# Altium PCB RX_PCB.PcbDoc
Units mil, origin at the board's own origin, x right, y up, seen from the top; angles counter-clockwise.
Board outline 640 x 1508 mil, 2 copper layers (Top Layer, Bottom Layer); 42 components, 35 nets, 158 pads, 44 vias.
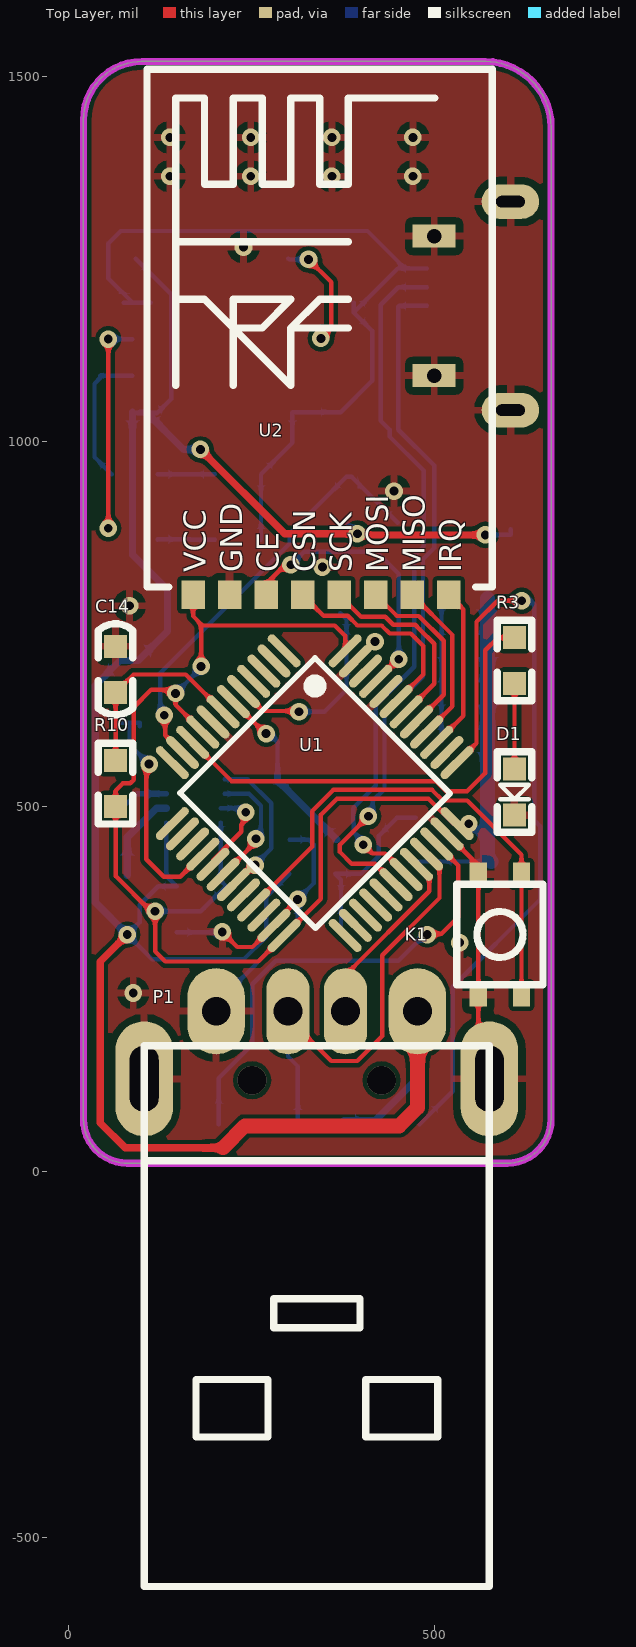
[diagram p0: Top Layer view]
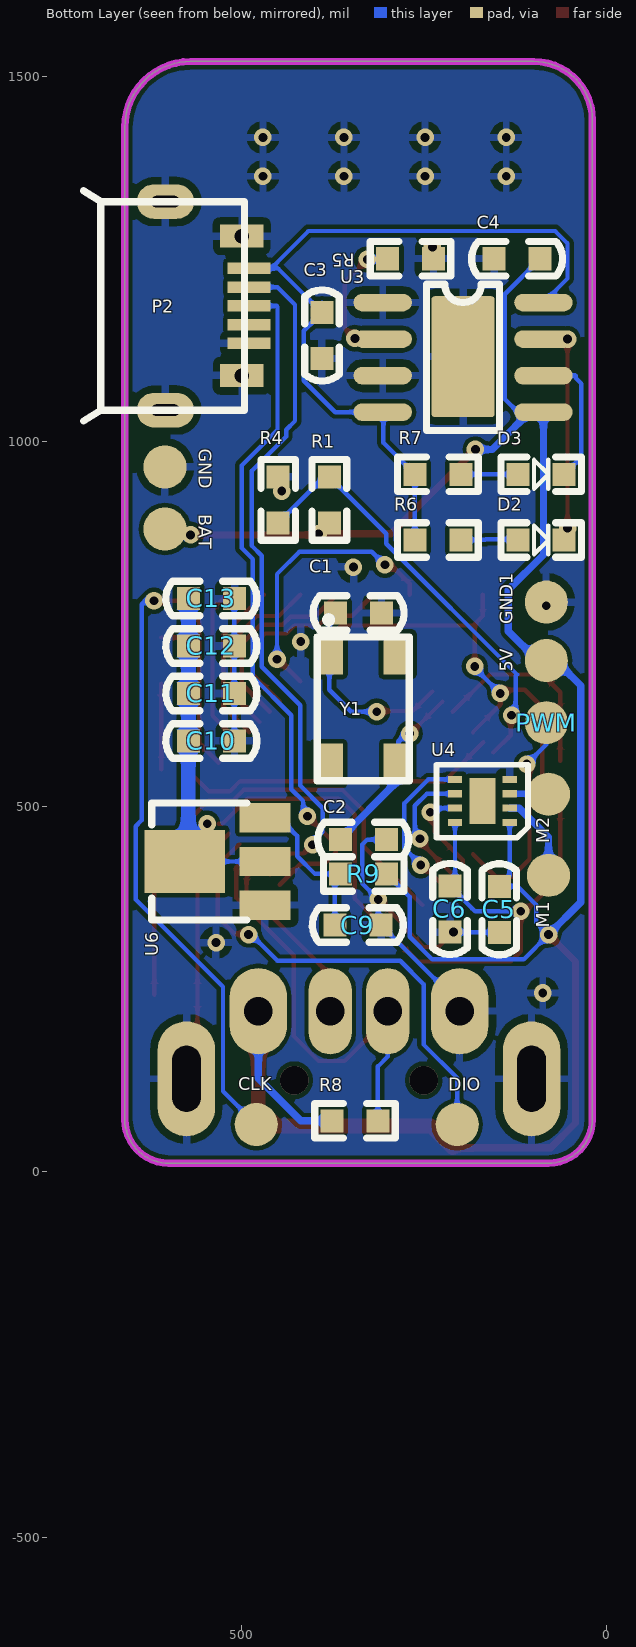
[diagram p1: Bottom Layer view, seen from below]
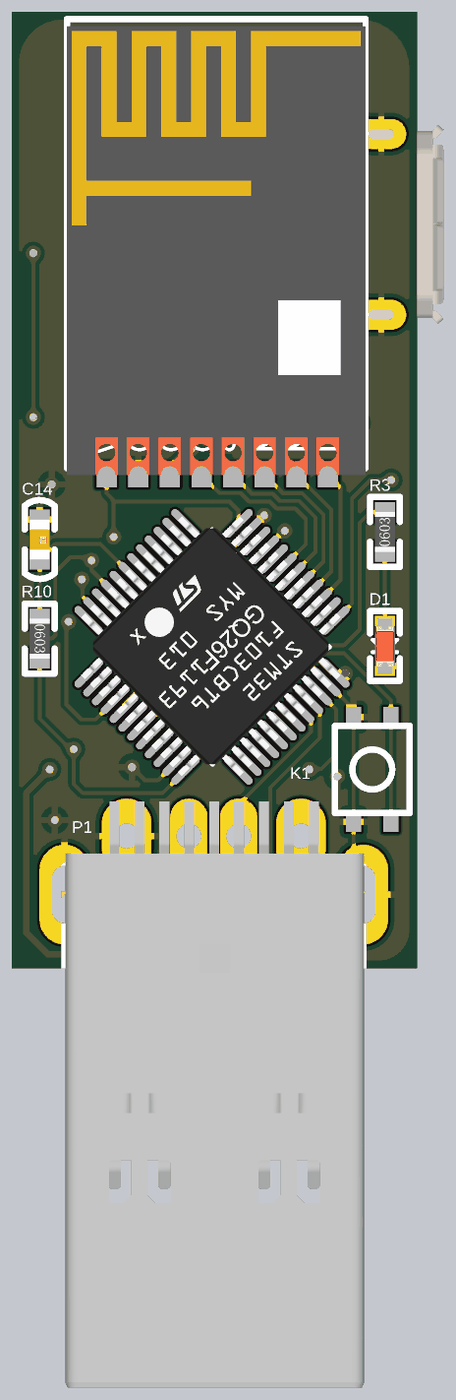
[diagram p2: 3D render of the assembled board from above, using the file's embedded part models]
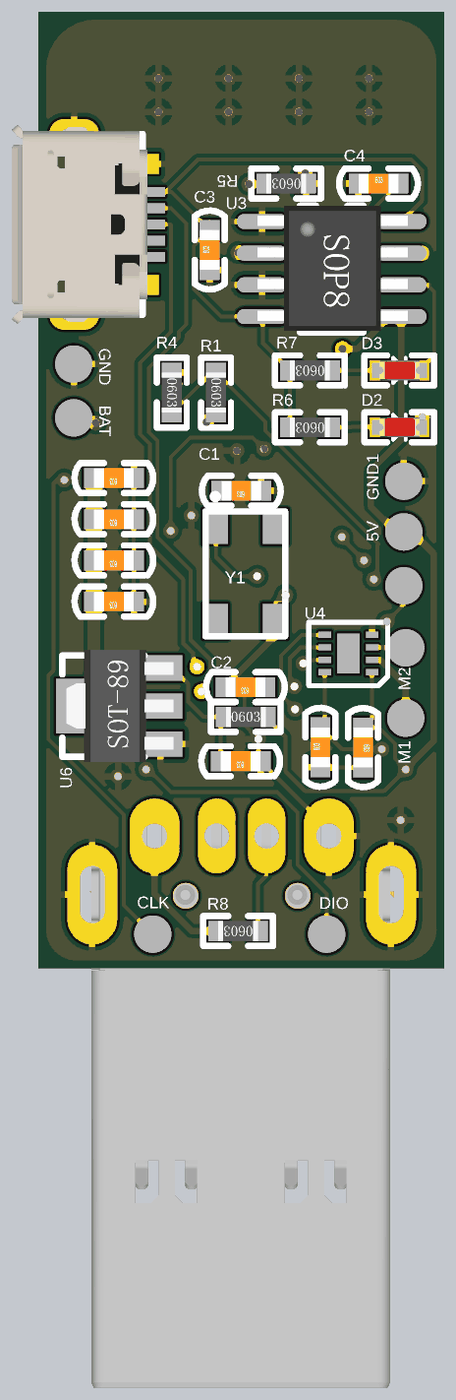
[diagram p3: 3D render of the assembled board from below, using the file's embedded part models]

## Layer stack, top to bottom
Top Solder: solder mask 0.4, Solder Resist, Dk 3.5
Top Layer: signal copper 1.4
Dielectric 1: dielectric 12.6, FR-4, Dk 4.8
Bottom Layer: signal copper 1.4
Bottom Solder: solder mask 0.4, Solder Resist, Dk 3.5

## Board outline
20,72 ccw(c80,72) 80,12 600,12 ccw(c600,72) 660,72 660,1430 ccw(c570,1430) 570,1520 100,1520 ccw(c100,1440) 20,1440

## Design rules (kind name [scope] priority, off if disabled: settings)
Clearance [All] p1: gap=6 ignorepadtopadclearanceinfootprint=FALSE except(0: Arc-Hole Track-Hole SMDPad-Hole THPad-Hole Via-Hole Fill-Hole Poly-Hole Region-Hole Text-Hole)
ComponentClearance [All] p1 off: gap=1 collisioncheckmode=3 verticalgap=1 showdistances=FALSE
Height [All] p1 off: minheight=0 maxheight=1000 prefheight=500
HoleSize [IsVia] p1: absolutevalues=TRUE maxlimit=100 minlimit=5 maxpercent=80.000 minpercent=20.000
HoleToHoleClearance [All] p1: gap=1 allowstackedmicrovias=TRUE
MinimumSolderMaskSliver [All] p1: minsoldermaskwidth=1
PolygonConnect [All] p1: connectstyle=Relief reliefconductorwidth=10 reliefentries=4 polygonreliefangle="90 Angle" airgapwidth=10
RoutingVias [All] p1: holewidth=12 width=24 viastyle="Through Hole" minholewidth=5 minwidth=5 maxholewidth=28 maxwidth=50
SMDNeckDown [All] p1: percent=80.000
SilkToSilkClearance [All] p1: silktosilkclearance=1
SilkToSolderMaskClearance [IsPad] p1: minsilkscreentomaskgap=0 clearancetoexposedcopper=TRUE
SolderMaskExpansion [All] p1: expansion=4
UnpouredPolygon [All] p1 off:
Width [All] p1: maxlimit=100 minlimit=6 preferedwidth=6
22 further rules are at their usual default settings.

## Components (designator, comment, footprint, x,y, rotation, side; value= is the part's Value field where it differs from the comment)
5V "5V" PAD_B 83,700 r0 bottom
BAT "BAT" PAD_B 605,880 r90 bottom
C1 "22pf" 电容_C0603 340,765 r0 bottom
C2 "22pf" 电容_C0603 333.5,455 r0 bottom
C3 "4.7uF" 电容_C0603 390,1145 r90 bottom
C4 "4.7uF" 电容_C0603 123,1250 r180 bottom
C5 "4.7uF" 电容_C0603 147.4,359.53 r270 bottom
C6 "4.7uF" 电容_C0603 215,360 r90 bottom
C9 "22uF" 电容_C0603 341,338 r0 bottom
C10 "1uF" 电容_C0603 541.5,590 r0 bottom
C11 "1uF" 电容_C0603 541.5,655 r0 bottom
C12 "1uF" 电容_C0603 541.5,720 r0 bottom
C13 "22uF" 电容_C0603 541.5,785 r0 bottom
C14 "4.7uF" 电容_C0603 64,688 r270 top
CLK "CLK" PAD_B 480,65 r0 bottom
D1 "red" LED_0603 610,520 r270 top
D2 "red" LED_0603 90,865.16 r180 bottom
D3 "green" LED_0603 90,955 r180 bottom
DIO "DIO" PAD_B 205,65 r0 bottom
GND "GND" PAD_B 605,965 r90 bottom
GND1 "GND" PAD_B 83,780 r0 bottom (schematic designator GND)
K1 "key" 开关按键_SKTH 590,325 r90 top
M1 "M1-OUT1" PAD_B 80,406 r90 bottom
M2 "M1-OUT2" PAD_B 80,517 r90 bottom
P1 "USB MHDR" "接插件_USB 公头 90°" 477.17,220 r90 top
P2 "MICRO USB" "接插件_MICRO 牛角插座 USB 卷边" 496.06,1185.47 r90 bottom
PWM "PWM" Pad_B 83,615 r270 bottom
R1 "10K" 电阻_R0603 380,920 r270 bottom
R3 "100R" 电阻_R0603 610,700 r90 top
R4 "10K" 电阻_R0603 450,920 r270 bottom
R5 "2k" 电阻_R0603 269,1250 r0 bottom
R6 "2k" 电阻_R0603 231.5,865.16 r0 bottom
R7 "2k" 电阻_R0603 231.5,955 r0 bottom
R8 "1.5k" 电阻_R0603 345,70 r0 bottom
R9 "1R" 电阻_R0603 333,408 r180 bottom
R10 "10K" 电阻_R0603 64,531.5 r270 top
U1 "STM32F103C8T6" STM32F103C8T6 340,515 r225 top
U2 "U?" NRF-1 107.01,800.83 r0 top
U3 "TP4056" SOP-8_PAD 197,1116 r180 bottom
U4 "DRV883x" WSON-8 133.2,537.37 r0 bottom
U6 "AMS1117" 稳压芯片_SOT-89 468,365 r90 bottom
Y1 "XTAL" 晶振_5032 381,708.61 r270 bottom

## Footprints (in the part's own frame and the unit in brackets; to place one, negate y for a bottom-side part, rotate by r counter-clockwise, add the part's x,y. Pads: shape width x height; smd on the part's side, far side on the other; paste and mask are expansions set on the pad)
LED_0603 [mm]
  rect 0.8x0.8 smd paste-0.1: A(-0.8,0) K(0.8,0)
  silkscreen extent -1.4,-0.6 1.4,0.6, body extent -0.8,-0.4 0.82,0.4, height 0.6
NRF-1 [mm]
  rect 0.813x1 smd: 1(1.6,-0.275) 2(2.87,-0.275) 3(4.14,-0.275) 4(5.41,-0.275) 5(6.68,-0.275) 6(7.95,-0.275) 7(9.22,-0.275) 8(10.49,-0.275)
  silkscreen extent 0,0 12,18, body extent -0.01,-0.28 11.99,17.72, height 2.27
PAD_B [mm]
  round 1.5 smd: 1(0,0)
Pad_B [mm]
  round 1.5 smd: 1(0,0)
SOP-8_PAD [mil]
  oval 80x24 smd: 1(-110,74) 2(-110,24) 3(-110,-26) 4(-110,-76) 5(110,-76) 6(110,-26) 7(110,24) 8(110,74)
  rrect10% 86.61x165.35 smd: 3(0,0)
  silkscreen extent -50,-101 50,99, body extent -118,-99 120,99, height 63
STM32F103C8T6 [mm]
  oval 0.3x1.5 smd: 1(-2.75,-4.377) 2(-2.25,-4.377) 3(-1.75,-4.377) 4(-1.25,-4.377) 5(-0.75,-4.377) 6(-0.25,-4.377) 7(0.25,-4.377) 8(0.75,-4.377) 9(1.25,-4.377) 10(1.75,-4.377) 11(2.25,-4.377) 12(2.75,-4.377) 25(2.75,4.123) 26(2.25,4.123) 27(1.75,4.123) 28(1.25,4.123) 29(0.75,4.123) 30(0.25,4.123) 31(-0.25,4.123) 32(-0.75,4.123) 33(-1.25,4.123) 34(-1.75,4.123) 35(-2.25,4.123) 36(-2.75,4.123)
  oval 1.5x0.3 smd: 13(4.25,-2.877) 14(4.25,-2.377) 15(4.25,-1.877) 16(4.25,-1.377) 17(4.25,-0.877) 18(4.25,-0.377) 19(4.25,0.123) 20(4.25,0.623) 21(4.25,1.123) 22(4.25,1.623) 23(4.25,2.123) 24(4.25,2.623) 37(-4.25,2.623) 38(-4.25,2.123) 39(-4.25,1.623) 40(-4.25,1.123) 41(-4.25,0.623) 42(-4.25,0.123) 43(-4.25,-0.377) 44(-4.25,-0.877) 45(-4.25,-1.377) 46(-4.25,-1.877) 47(-4.25,-2.377) 48(-4.25,-2.877)
  silkscreen extent -3.33,-3.44 3.3,3.21, body extent -4.5,-4.69 4.52,4.33, height 1.5
WSON-8 [mm]
  rect 0.5x0.25 smd: 1(0,1.5) 2(0,1) 3(0,0.5) 4(0,0) 5(1.9,0) 6(1.9,0.5) 7(1.9,1) 8(1.9,1.5)
  rect 0.9x1.6 smd mask+0.102: 9(0.95,0.75)
  silkscreen extent -0.64,-0.51 2.54,2.03
开关按键_SKTH [mm]
  rect 0.8x0.6 smd: 1(-2.1,-0.75) 1(2.1,-0.75) 2(-2.1,0.75) 2(2.1,0.75)
  silkscreen extent -1.75,-1.5 1.75,1.5
"接插件_MICRO 牛角插座 USB 卷边" [mm]
  oval 1.2x2 hole 0.4 slot 1 at 90 deg: 0(-3.625,2.75) 0(3.625,2.75)
  rect 0.8x1.5 hole 0.5: 0(-2.425,0.1) 0(2.425,0.1)
  rect 0.4x1.5 smd: 1(1.3,-0.15) 2(0.65,-0.15) 3(0,-0.15) 4(-0.65,-0.15) 5(-1.3,-0.15)
  silkscreen extent -4,0 4,5.6, body extent -3.99,-0.18 3.99,5.25, height 2.73
"接插件_USB 公头 90°" [mm]
  oval 4x2 hole 1 slot 2.3 at 0 deg paste+0.762: 0(-2.35,9.5) 0(-2.35,-2.5)
  oval 3x2 hole 1 paste+0.762: 1(0,0) 4(0,7)
  oval 3x1.5 hole 1 paste+0.762: 2(0,2.5) 3(0,4.5)
  silkscreen extent -20,-2.5 -1.2,9.5, body extent -22.11,-2.54 1.39,9.46, height 2.27
晶振_5032 [mm]
  rect 1.4x1 smd: 0(0,2.4) 0(3.8,0) 1(0,0) 2(3.8,2.4)
  silkscreen extent -1.3,-0.4 4.4,2.8
电容_C0603 [mm]
  rect 0.8x0.8 smd: 1(-0.8,0) 2(0.8,0)
  silkscreen extent -1.58,-0.6 1.58,0.6, body extent -0.8,-0.4 0.8,0.4, height 0.3
电阻_R0603 [mm]
  rect 0.8x0.8 smd: 1(-0.8,0) 2(0.8,0)
  silkscreen extent -1.4,-0.6 1.4,0.6, body extent -0.8,-0.4 0.8,0.4, height 0.45
稳压芯片_SOT-89 [mil]
  rect 40x70 smd: 1(0,0) 2(60,0) 3(120,0)
  rect 86.61x110.24 smd: 2(60,110)
  silkscreen extent -20,25 140,155, body extent -28,-21 149,148, height 59

## Part data
5V BAT CLK DIO GND GND1 M1 M2 PWM: library part Pad, _Comma=,, _Funcyusa=Test, _Name=Pad
  5V: _Remarks=5V, _Specification=Pad,Test,5V
  BAT: _Remarks=BAT, _Specification=Pad,Test,BAT
  CLK: _Remarks=CLK, _Specification=Pad,Test,CLK
  DIO: _Remarks=DIO, _Specification=Pad,Test,DIO
  GND GND1: _Remarks=GND, _Specification=Pad,Test,GND
  M1: _Remarks=M1-OUT1, _Specification=Pad,Test,M1-OUT1
  M2: _Remarks=M1-OUT2, _Specification=Pad,Test,M1-OUT2
  PWM: _Remarks=PWM, _Specification=Pad,Test,PWM
C1 C2 C3 C4 C5 C6 C9 C10 C11 C12 C13 C14: library part cap, U=50V, 参数=Cap,0805,X7R,104K,50V,125C,±10%
  C1 C2: C=22pf
  C3 C4 C5 C6 C14: C=4.7uF
  C9 C13: C=22uF
  C10 C11 C12: C=1uF
D1 D2 D3: library part LED, 参数=LED,0603,Red
K1: library part SW-PB_1, 参数="Key,TS-018A 2*4全包无柱带支架 力度250N", 备注=ADD
P2: library part "MICRO USB 5PIN", _Value=5PIN, _Comma=,, _Model="MICRO USB", _Name=Port, _Specification="Port,MICRO USB,5PIN"
R1 R3 R4 R5 R6 R7 R8 R9 R10: library part Res, P=1/8W, 参数=Res,0805,0R,±1%,1/8W,100ppm,155C
  R1 R4 R10: R=10K
  R3: R=100R
  R5 R6: R=2k
  R7: R=10k
  R8: R=1.5k
  R9: R=1R
U1: BOM_LCSC Assembly=Yes, BOM_Manufacturer=STMicroelectronics, BOM_Manufacturer Part=STM32F103C8T6, BOM_Supplier=LCSC, BOM_Supplier Part=C8734, image=//image.lceda.cn/szlcsc/C8734.jpg, SMT Type=Basic, spicePre=U, spiceSymbolName=STM32F103C8T6, timeStamp=1455028086
U2: library part NRF, "NRF24L01"
U3: 参数="Charge Control,LP4056,ESOP-8"
Y1: F=8m

## Via types
v1: diameter 24, hole 12, Top Layer to Bottom Layer, tented both sides, 39 vias
v2: diameter 24, hole 12, Top Layer to Bottom Layer, 3 vias
v3: diameter 39.37, hole 39.37, Top Layer to Bottom Layer, 2 vias

## Nets (pads, with @x,y where several pads share a name; then routed paths per layer and width w, separated by ;. In a path a pad name is that pad's centre, name@x,y a point inside that pad or via, vN(x,y) a via of type N, cw(c..) or ccw(c..) an arc to the next point about the centre after c; other vN are vias at no path point)
3V3: C6.2 C10.2 C11.2 C12.2 C13.2 R10.2 U1.9 U1.24 U1.36 U1.48 U2.1 U4.8 U6.2 | length 2268.1
  Top Layer w6: U2.1 170,761 181,750 ; v1(181,692) 181,750 ; U1.9 146,639.4 v1(146,655) 146,659 145,660 112.5,660 88.75,636.25 88.75,540.55 89,540.3 89,537 84,532 74,532 64,522 R10.2 64,405 112,357 v1(118,357) 118,302 131.94,288.06 259.1,288.06 U1.24 345,373.96 345,489 367,511 492.21,511 526.43,476.78 U1.36 ; U1.48 378.22,733.78 364,748 183,748 181,750
  Bottom Layer w6: v1(118,357) 180.5,357 C6.2 ; v1(146,655) 181,690 v1(181,692) ; 185.5,361 185.5,362 C6.2 ; U4.8 208,398.5 C6.2 ; U6.2@468,425 578,425 578,446 v1(547.22,476.78)
  Bottom Layer w20: C13.2 C12.2 C11.2 C10.2 572.99,430.01 U6.2@578,425
5V: 5V.1 BAT.1 C4.2 C5.1 P1.1 R1.2 R8.2 R9.2 U3.5 U4.1 | length 3300.6
  Top Layer w6: v1(395,873.5) v1@396.5,872
  Top Layer w10: v1(80,325) 43,288 43,67 77,33 211,33 ; v2(180,989) 295.5,873.5 v1(395,873.5) ; v1@396.5,872 v1(570,872)
  Top Layer w20: 211,33 241,63 452,63 477.17,88.17 P1.1
  Bottom Layer w6: U3.5 88,1039 121,1039 140,1058 140,1201.5 C4.2 ; U3.5@96,1040 U3.5@106,1040 ; U4.1 133.2,405.23 C5.1 122.33,391.02 97,365.7 97,342 v1(80,325) 114,291 239,291 270,322 270,376.5 R9.2 ; R1.2 v1(395,873.5) ; v1(570,872) 605,872 BAT.1
  Bottom Layer w10: v1(80,325) 36,369 36,666 70,700 5V.1 95,700 135,740 135,797 87,845 U3.5 ; U3.5@106,1040 157,989 v2(180,989) ; R8.2 419,70 477.17,128.17 P1.1
BAT_DET: R1.1 R4.2 U1.11 | length 593.3
  Top Layer w6: v1(130.53,625.18) 131.86,623.84 131.86,597.86 U1.11
  Bottom Layer w6: v1(130.53,625.18) 125,630.7 125,678.94 123,680.94 302,859.94 302,873.5 R1.1 387.01,951.5 R4.2
GND: C1.1 C2.1 C3.1 C4.1 C5.2 C6.1 C9.1 C10.1 C11.1 C12.1 C13.1 C14.1 D1.K GND1.1 GND.1 K1.2 P1.0 P1.4 P2.0 P2.5 R4.1 R5.1 U1.8 U1.23 U1.35 U1.44 U1.47 U2.2 U3.1 U3.3 U4.4 U6.1 | length 1107
  Top Layer w6: P1.4 P1.4@215.99,220 ; v1(210,328.5) 230.5,308 251.2,308 U1.23 280.79,340.79 v1(313,373) ; U1.35 560.47,419.8 560.47,407.68 560.47,242.32 560.47,142.6 P1.0@575.59,127.48
  Bottom Layer w6: C5.2 214.53,328.03 210,323.5 v1(210,328.5) ; P1.4 201.57,230.07 C9.1 313,341.5 v1(313,373) 335,395 335,448.25 328.25,455 C2.1 ; C10.1 C11.1 C12.1 C13.1
  other v1: 88,245 535,314 419,726 83,775 347,828 445,932 239,1266 138,1363 249,1363 360,1363 471,1363 138,1416 249,1416 360,1416 471,1416
KEY: K1.1 U1.21 | length 688.9
  Top Layer w6: U1.21 333,445.47 333,493.97 362.03,523 497.18,523 511.79,508.39 545.31,508.39 568.22,485.48 619.53,434.17 619.53,407.68 K1.1@619.53,242.32
LED: R3.2 U1.10 | length 654
  Top Layer w6: U1.10 222.56,535 502.15,535 516.15,521 545,521 570,546 570,714 587.5,731.5 R3.2
M1-IN1: U1.18 U4.6 | length 173.6
  Top Layer w6: U1.18 257,452.99 256,453.99 v1(256,456)
  Bottom Layer w6: U4.6@213,517.68 246.49,517.68 263,501.17 263,462.21 256.79,456 v1(256,456)
M1-IN2: U1.19 U4.5 | length 214.1
  Top Layer w6: U1.19 251.85,420 v1(255,420)
  Bottom Layer w6: U4.5@213,537.37 244.63,537.37 277.26,504.74 277.26,443.26 254,420 v1(255,420)
M1-SLP: U1.17 U4.7 | length 140.5
  Top Layer w6: U1.17 197.27,426.97 236,465.7 236,475 242,481 v1(242,492.47) 242.53,492.47 v1@237,498 ; v1@237,498 235,496 236.74,497.74 v1@237,498
  Bottom Layer w6: U4.7 236.47,498 v1(242,492.47) v1@241.76,492.24
MCU_RX: P2.2 U1.31 | length 977.4
  Top Layer w6: v2(403,448) 415,436 432.92,436 U1.31 U1.31@460.75,407.18
  Bottom Layer w6: v2(403,448) v2@407,448 ; P2.2 451,1211.06 427,1187.06 427,1028 439,1016 439,1006.72 486,959.72 486,856.97 472.67,843.64 472.67,837.67 472.67,714 472.67,691.67 420,639 420,529 389,498 389,478.3 389.75,477.55 389.75,465.25 401,454 v2@407,448 ; v2@407,448 411,448 412,447 410,445 v2@407,448
MCU_TX: P2.3 U1.30 | length 958.6
  Top Layer w6: v2(410,487) 371,448 371,438 387,422 419.08,422 U1.30
  Bottom Layer w6: v2(410,487) 416,487 416,508.03 432,524.03 432,625 484.67,677.67 484.67,838.67 500,854 500,967 451,1016 451,1184.47 452,1185.47 P2.3
NetC9_2: C9.2 R9.1 U6.3 | length 231.9
  Bottom Layer w6: C9.2 372.5,400 R9.1 399.7,408 424,432.3 424,460 449,485 U6.3 U6.3@475,485
NetD1_A: D1.A R3.1 | length 117
  Top Layer w6: D1.A R3.1
NetD2_A: D2.A R6.1 | length 79.7
  Bottom Layer w6: D2.A 121.5,866 166.16,866 167,865.16 R6.1
NetD2_K: D2.K U3.7 | length 292
  Top Layer w6: v1(54,881) v1(54,1140)
  Bottom Layer w6: v1(54,1140) U3.7
NetD3_A: D3.A R7.1 | length 78.5
  Bottom Layer w6: D3.A R7.1
NetD3_K: D3.K U3.6 | length 192
  Bottom Layer w6: D3.K 35,978.5 35,1079 43,1087 43,1090 U3.6
NetM1_1: M1.1 U4.2 | length 121.8
  Bottom Layer w10: M1.1 80,458 120,498 U4.2
NetM2_1: M2.1 U4.3 | length 72.6
  Bottom Layer w6: M2.1@70,495 M2.1@92.68,517.68
  Bottom Layer w8: M2.1@92.68,517.68 U4.3
NetR5_2: R5.2 U3.2 | length 154.6
  Top Layer w6: v1(328,1249) 359,1218 359,1155 v1(345,1141)
  Bottom Layer w6: R5.2 301.5,1249 v1(328,1249)
NRF_CE: U1.45 U2.3 | length 388.4
  Top Layer w6: U2.3 270,805 296,831 v1(304,831) ; U1.45 450,701.67 v1(451.67,701.67)
  Bottom Layer w6: v1(304,831) 322,849 421,849 451.67,818.33 v1(451.67,701.67)
NRF_CSN: U1.43 U2.4 | length 285.6
  Top Layer w6: U2.4 348.69,761.31 381.71,761.31 394.97,748.06 428,748.06 439.06,737 440,737 468,737 474,731 485,720 485,680.99 U1.43
NRF_IRQ: U1.39 U2.8 | length 218.2
  Top Layer w6: U1.39@508.5,593.13 540,624.63 540,770 U2.8
NRF_MISO: U1.40 U2.7 | length 225.4
  Top Layer w6: U2.7 525,735 525,637.47 U1.40
NRF_MOSI: U1.41 U2.6 | length 245.6
  Top Layer w6: U2.6 449,761 479,761 513,727 513,653.31 U1.41
NRF_SCK: U1.42 U2.5 | length 266.7
  Top Layer w6: U2.5 399.94,760.06 432.97,760.06 444.03,749 474.03,749 480.03,743 500,723.03 500,668.15 U1.42
NRST: C14.2 R10.1 U1.7 | length 272
  Top Layer w6: R10.1 C14.2 88.5,681 160.08,681 U1.7
OSC_IN: C1.2 U1.5 Y1.1 | length 272
  Top Layer w6: U1.5 265.76,631 v1@314,631
  Bottom Layer w6: v1(315,630) 350,630 380,660 380,695 380,756.5 C1.2
OSC_OUT: C2.2 U1.6 Y1.2 | length 252.4
  Top Layer w6: U1.6 268.92,600 v1(270,600)
  Bottom Layer w6: v1(270,600) 275,600 285.51,589.49 Y1.2@285.51,545.39
  Bottom Layer w10: Y1.2@285.51,545.39 285.51,535.98 366.5,455 C2.2
PWM: PWM.1 U1.16 | length 331.8
  Top Layer w6: v1(109.75,558.34) 106,554.59 106,428 130,404 152.33,404 U1.16
  Bottom Layer w6: PWM.1@70,615 97,615 PWM.1@97,610 ; PWM.1 83,585.08 v1(109.75,558.34)
SWCLK: CLK.1 U1.37 | length 1080.5
  Top Layer w6: U1.37 558,586.96 558,753 587,782 v1(620,782)
  Bottom Layer w6: CLK.1 525.54,110.54 525.54,253.54 645,373 645,473.27 637,481.27 637,777 632,782 v1(620,782)
SWDIO: DIO.1 U1.34 | length 648.3
  Top Layer w6: v1(490.5,325) 489,325 488,326 510,326 533,349 533,419.44 U1.34
  Bottom Layer w6: DIO.1 205,128.48 251,174.48 251,257 283.06,289.06 451.06,289.06 487,325 v1(490.5,325)
USB_5V: C3.2 P2.1 R6.2 R7.2 U3.4 U3.8 | length 1126.9
  Bottom Layer w6: U3.8@75,1190 U3.8@112,1190 ; U3.8 54,1223 54,1271 71,1288 408.65,1288 460,1236.65 ; R6.2 R7.2 306,998.01 U3.4@306,1040 ; U3.4 371.97,1040 415,1083.03 415,1151.5 C3.2 ; C3.2@390,1190 C3.2 ; P2.1 450.16,1236.65 C3.2
USB_D+: P1.3 R8.1 U1.33 | length 620.8
  Top Layer w6: P1.3 300,210.94 358.99,151.95 394.7,151.95 428.8,186.04 428.8,296.49 507.26,374.96 507.26,417.33 U1.33
  Bottom Layer w6: P1.3 300,158 313.5,144.5 R8.1
USB_D-: P1.2 U1.32 | length 255.9
  Top Layer w6: P1.2 378.74,269.69 493.35,384.3 493.35,403.41 U1.32
pads on no net: P2.4 U1.1 U1.2 U1.3 U1.4 U1.12 U1.13 U1.14 U1.15 U1.20 U1.22 U1.25 U1.26 U1.27 U1.28 U1.29 U1.38 U1.46 U4.9 Y1.0
copper on no net:
  other v3: 250.79,125.51 427.95,125.51

## Polygon pours and split planes (outlines as drawn)
GND on Top Layer "TOP_GND" (solid, remove dead copper, pour order 30): -34,11 753,11 758,6 758,1575 -64,1575 -16,1527 -16,6
GND on Bottom Layer "Bottom_GND" (solid, remove dead copper, pour order 32): -38,-9 767,-9 784,8 771,21 771,1601 -54,1601 -72,1583 -38,1549

## Keep-outs
Keep-Out Layer:
  the board outline again, w10

## Text inside footprints (layer, text, board x,y; h text height)
U2: Top Overlay "IRQ" at 537.01,820.83 h30 r90; Top Overlay "MISO" at 487.01,820.83 h30 r90; Top Overlay "MOSI" at 437.01,820.83 h30 r90; Top Overlay "SCK" at 387.01,820.83 h30 r90; Top Overlay "CSN" at 337.01,820.83 h30 r90; Top Overlay "CE" at 287.01,820.83 h30 r90; Top Overlay "GND" at 237.01,820.83 h30 r90; Top Overlay "VCC" at 187.01,820.83 h30 r90